# Altium PCB 十二进十二出 .PcbDoc (part 3 of 3)
Units mil, origin at the board's own origin, x right, y up, seen from the top; angles counter-clockwise.
Board outline 4818.9 x 3440.94 mil, 2 copper layers (Top Layer, Bottom Layer); 184 components, 190 nets, 626 pads, 130 vias.
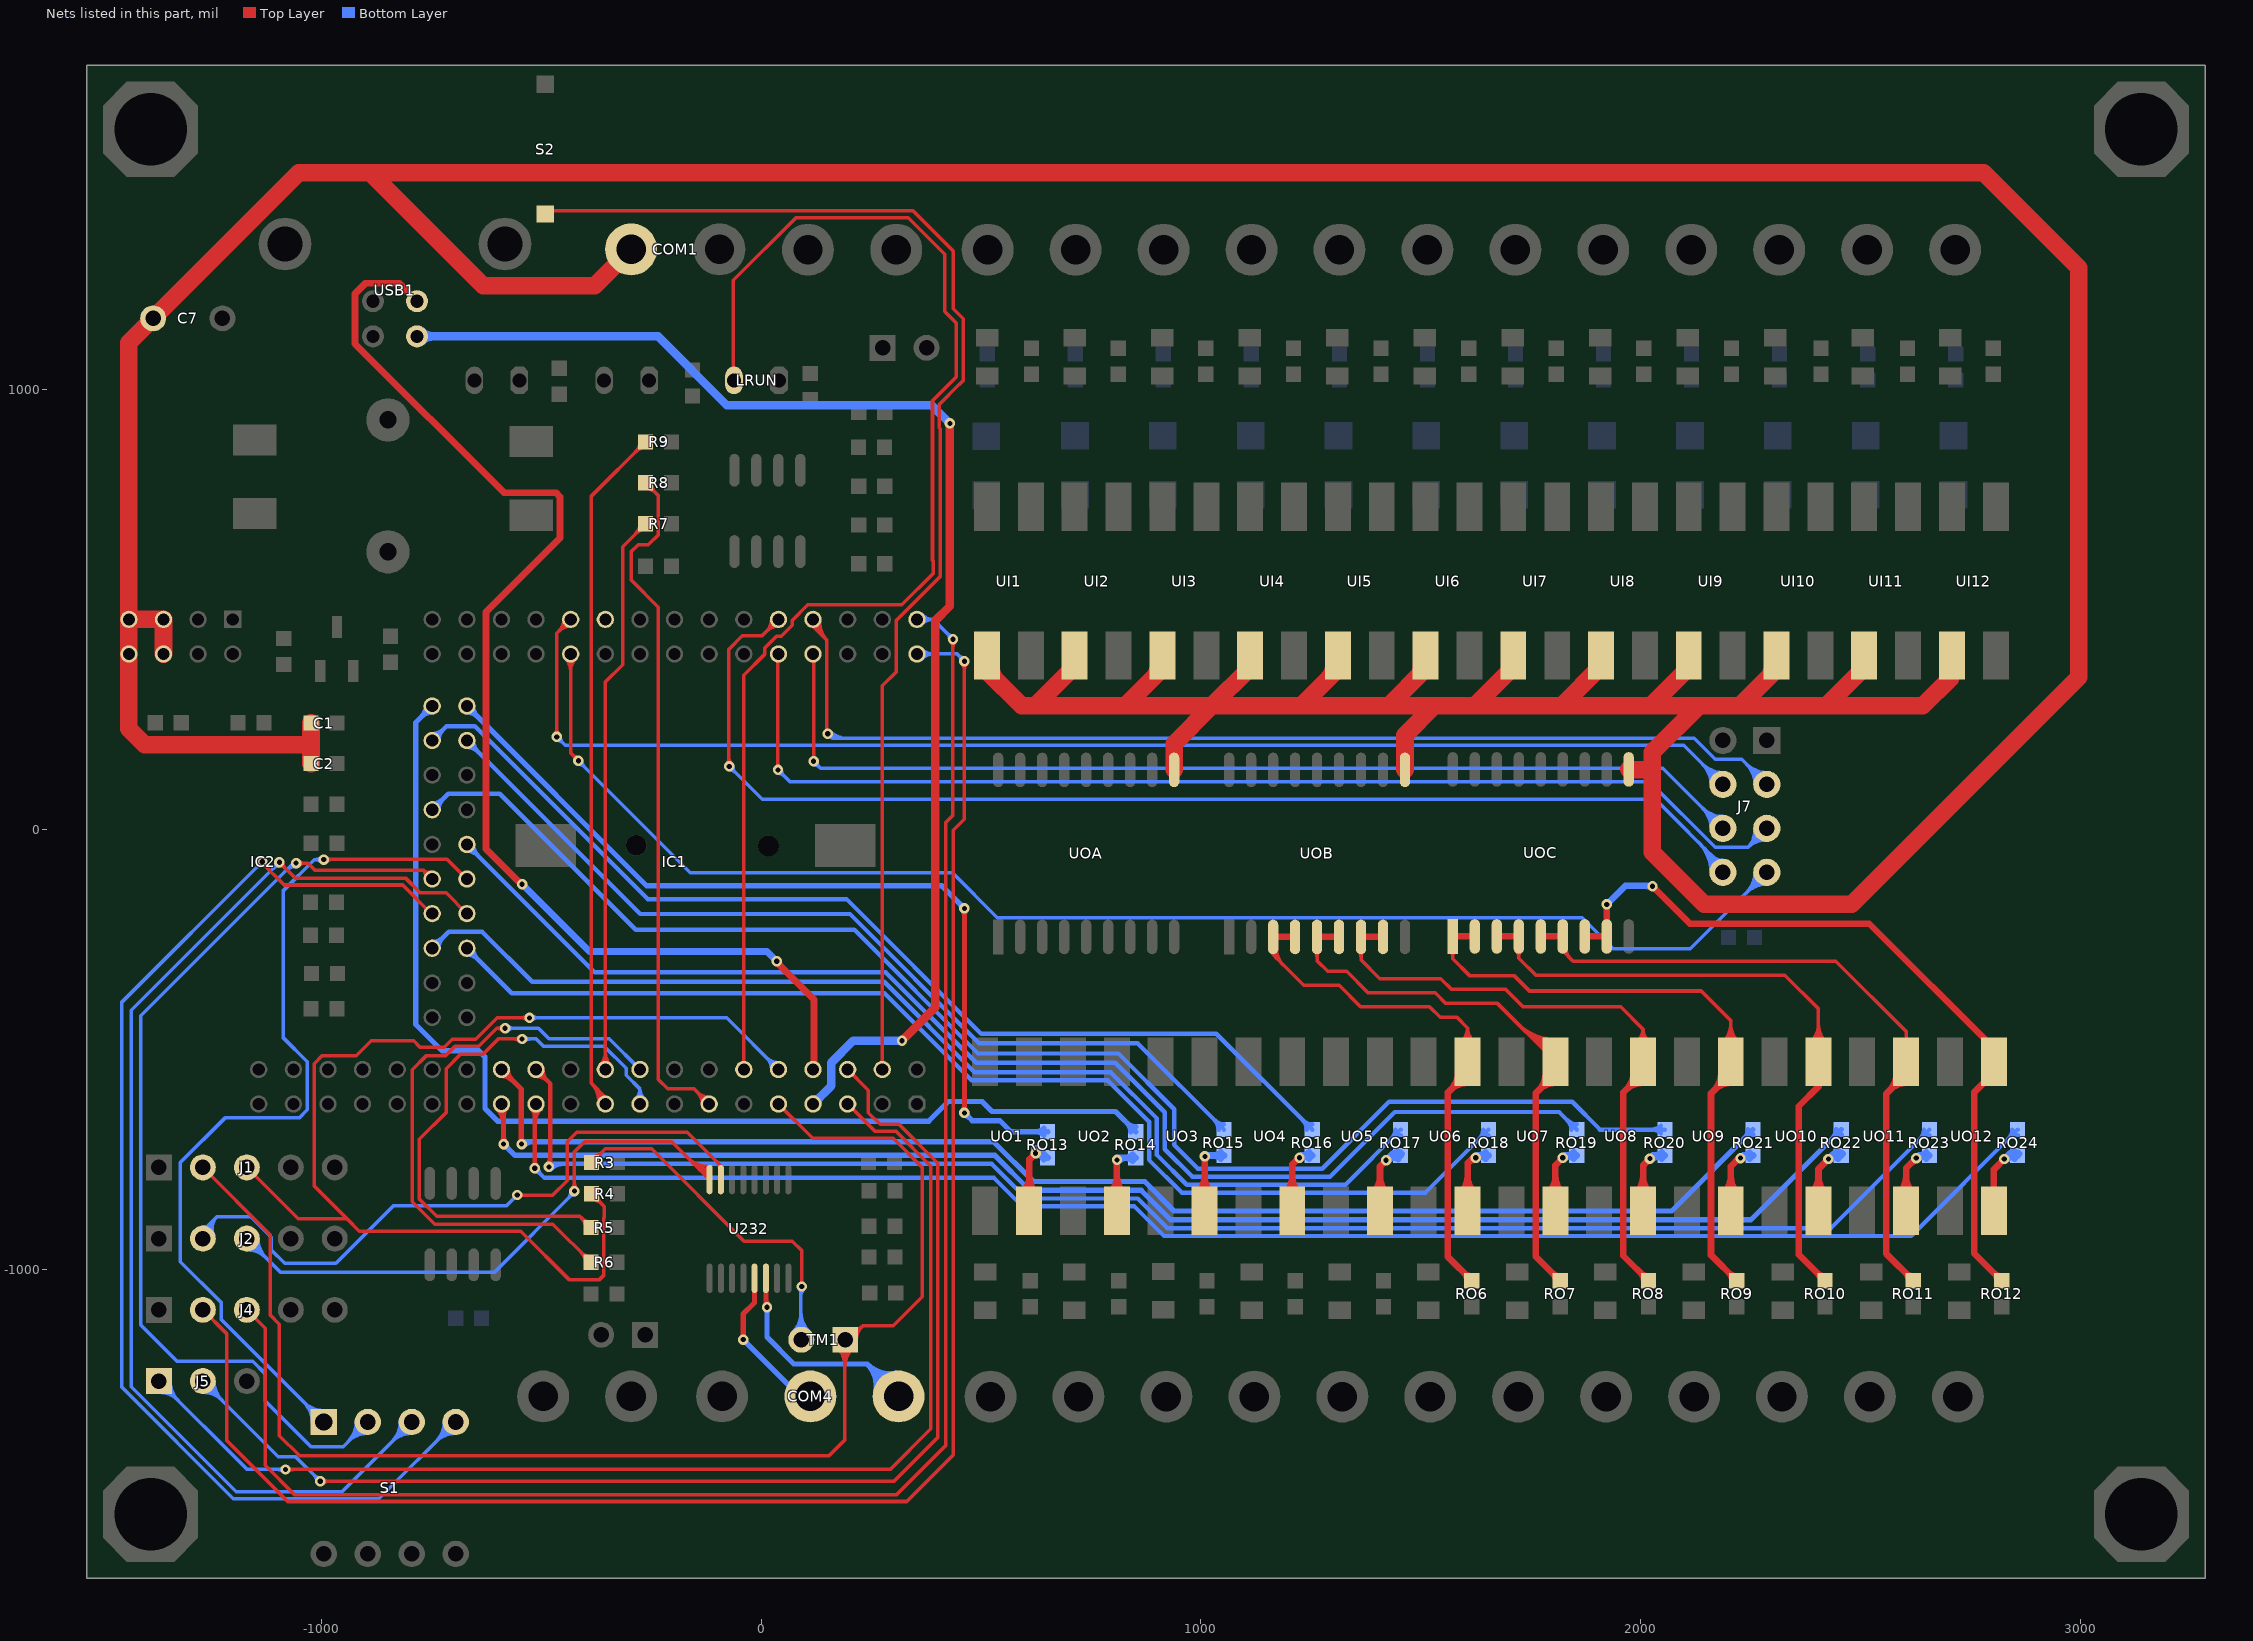
[diagram p3: the nets of this part, all layers, seen from the top]

## Via types
v1: diameter 23.62, hole 11.81, Top Layer to Bottom Layer, 130 vias

## Nets (pads, with @x,y where several pads share a name; then routed paths per layer and width w, separated by ;. In a path a pad name is that pad's centre, name@x,y a point inside that pad or via, vN(x,y) a via of type N, cw(c..) or ccw(c..) an arc to the next point about the centre after c; other vN are vias at no path point) (continued)
NetRO6_1: RO6.1 UO6.3 UOB.3 UOB.4 | length 1532.7
  Top Layer w8: UOB.3@1160.48,-278.59 cw(c1157.23,-284.7) 1164.15,-284.7 ; UOB.3@1163.96,-271.69 ccw(c1194.89,-271.69) 1173.02,-293.57 ; UOB.3@1164.15,-244.13 1164.15,-284.7 ; UOB.3@1167.81,-278.59 ccw(c1171.06,-284.7) 1164.15,-284.7 ; UOB.3@1171.96,-271.69 ccw(c1222.21,-271.69) 1186.67,-307.23 ; UO6.3@1591.28,-482.5 ccw(c1567.83,-451.51) 1606.69,-451.51 ; UO6.3@1596.11,-488.88 ccw(c1580.01,-467.6) 1606.69,-467.6 ccw(c1633.38,-467.6) UO6.3@1617.27,-488.88 ; UO6.3@1606.69,-528.44 1606.69,-451.51 ; UO6.3@1622.1,-482.5 cw(c1645.56,-451.51) 1606.69,-451.51 ; 1164.15,-284.7 1233.66,-354.21 1314.42,-354.21 1363.08,-402.87 1496.01,-402.87 1496.05,-402.84 1519.77,-402.84 1544.04,-427.12 1582.3,-427.12 1606.69,-451.51
  Top Layer w15: UOB.3@1170.01,-244.13 UOB.4@1214.15,-244.13 ; 1566.76,-592.6 cw(c1606.69,-632.53) UO6.3@1606.69,-576.06 ; 1570.05,-589.31 ccw(c1534.78,-554.03) UO6.3@1584.66,-554.03 ; RO6.1@1606.41,-1026.21 ccw(c1582.7,-1026.21) 1599.47,-1009.44 ccw(c1616.24,-992.68) RO6.1@1616.24,-1016.39 ; UO6.3@1606.69,-528.44 1606.69,-552.67 1561.79,-597.57 1561.79,-971.77 RO6.1@1616.24,-1026.21
NetRO7_1: RO7.1 UO7.3 UOB.5 UOB.6 | length 1751.4
  Top Layer w8: UOB.5@1258.62,-277.22 cw(c1245.29,-290.55) 1264.15,-290.55 cw(c1283,-290.55) UOB.5@1269.67,-277.22 ; UOB.5@1264.15,-244.13 1264.15,-298.15 1288.46,-322.46 1331.42,-322.46 1379.96,-371 1532.83,-371 1557.2,-395.37 1674.51,-395.37 1806.15,-527 UO7.3@1806.15,-528.44 ; 1721.34,-442.19 ccw(c1806.15,-357.38) UO7.3@1806.15,-477.32 ; 1734.99,-455.85 ccw(c1806.15,-384.7) UO7.3@1806.15,-485.32 ; 1748.65,-469.51 ccw(c1806.15,-412.01) UO7.3@1806.15,-493.32 ; 1762.31,-483.16 ccw(c1806.15,-439.33) UO7.3@1806.15,-501.32 ; 1775.96,-496.82 ccw(c1806.15,-466.64) UO7.3@1806.15,-509.32
  Top Layer w15: UOB.5@1264.15,-244.13 UOB.6@1314.15,-244.13 ; 1767.71,-593.65 ccw(c1728.09,-554.03) UO7.3@1784.12,-554.03 ; 1770.56,-590.8 cw(c1806.15,-626.39) UO7.3@1806.15,-576.06 ; UO7.3@1806.15,-528.44 1806.15,-555.21 1761.24,-600.11 1761.24,-970.4 RO7.1@1817.05,-1026.21 ; RO7.1@1807.23,-1026.21 ccw(c1783.52,-1026.21) 1800.29,-1009.44 ccw(c1817.05,-992.68) RO7.1@1817.05,-1016.39
NetRO8_1: RO8.1 UO8.3 UOB.7 UOB.8 | length 1685.7
  Top Layer w8: UOB.7@1358.62,-277.22 cw(c1345.29,-290.55) 1364.15,-290.55 cw(c1383,-290.55) UOB.7@1369.67,-277.22 ; UOB.7@1364.15,-244.13 1364.15,-296.15 1407,-339 1545.72,-339 1570.35,-363.62 1693.32,-363.62 1732.52,-402.83 1954.76,-402.83 2005.6,-453.67 ; UO8.3@1990.91,-481.97 ccw(c1970.99,-453.67) 2005.6,-453.67 ; UO8.3@1995.51,-488.52 ccw(c1981.83,-469.08) 2005.6,-469.08 ccw(c2029.37,-469.08) UO8.3@2015.69,-488.52 ; UO8.3@2005.6,-528.44 2005.6,-453.67 ; UO8.3@2020.29,-481.97 cw(c2040.21,-453.67) 2005.6,-453.67
  Top Layer w15: UOB.7@1364.15,-244.13 UOB.8@1414.15,-244.13 ; 1965.82,-592.54 cw(c2005.6,-632.31) UO8.3@2005.6,-576.06 ; 1968.9,-589.46 ccw(c1933.47,-554.03) UO8.3@1983.57,-554.03 ; UO8.3@2005.6,-528.44 2005.6,-552.76 1960.7,-597.66 1960.7,-969.04 RO8.1@2017.87,-1026.21 ; RO8.1@2008.05,-1026.21 ccw(c1984.34,-1026.21) 2001.1,-1009.44 ccw(c2017.87,-992.68) RO8.1@2017.87,-1016.39
NetRO9_1: RO9.1 UO9.3 UOC.1 UOC.2 | length 1739.7
  Top Layer w8: UOC.1@1567.48,-276.08 cw(c1554.14,-289.42) 1573,-289.42 cw(c1591.86,-289.42) UOC.1@1578.52,-276.08 ; UOC.1@1573,-243 1573,-294 1610.87,-331.87 1712.13,-331.87 1747.33,-367.08 2138.01,-367.08 2205.05,-434.12 UO9.3@2205.05,-528.44 ; UO9.3@2187,-484.8 ccw(c2143.43,-441.22) 2205.05,-441.22 ccw(c2266.68,-441.22) UO9.3@2223.11,-484.8 ; UO9.3@2192.66,-490.46 ccw(c2162.74,-460.54) 2205.05,-460.54 ccw(c2247.37,-460.54) UO9.3@2217.45,-490.46
  Top Layer w15: UOC.1@1573,-243 UOC.2@1623,-243 ; 2166.55,-593.81 ccw(c2126.78,-554.03) UO9.3@2183.03,-554.03 ; 2169.62,-590.74 cw(c2205.05,-626.17) UO9.3@2205.05,-576.06 ; UO9.3@2205.05,-528.44 2205.05,-555.3 2160.15,-600.21 2160.15,-967.68 RO9.1@2218.69,-1026.21 ; RO9.1@2208.87,-1026.21 ccw(c2185.15,-1026.21) 2201.92,-1009.44 ccw(c2218.69,-992.68) RO9.1@2218.69,-1016.39
NetRO10_1: RO10.1 UO10.3 UOC.3 UOC.4 | length 1745.3
  Top Layer w8: UOC.4@1717.48,-276.08 cw(c1704.14,-289.42) 1723,-289.42 cw(c1741.86,-289.42) UOC.4@1728.52,-276.08 ; UOC.4@1723,-243 1723,-292.19 1762.14,-331.33 2328.26,-331.33 2404.51,-407.58 UO10.3@2404.51,-528.44 ; UO10.3@2386.46,-484.8 ccw(c2342.88,-441.22) 2404.51,-441.22 ccw(c2466.14,-441.22) UO10.3@2422.56,-484.8 ; UO10.3@2392.12,-490.46 ccw(c2362.19,-460.54) 2404.51,-460.54 ccw(c2446.82,-460.54) UO10.3@2416.9,-490.46
  Top Layer w15: UOC.3@1673,-243 UOC.4@1723,-243 ; UO10.3@2397.73,-574.99 cw(c2394.71,-584.31) 2404.51,-584.31 ; UO10.3@2404.51,-528.44 2404.51,-584.31 ; RO10.1@2409.69,-1026.21 ccw(c2385.97,-1026.21) 2402.74,-1009.44 ccw(c2419.51,-992.68) RO10.1@2419.51,-1016.39 ; UO10.3@2411.29,-574.99 ccw(c2414.31,-584.31) 2404.51,-584.31 ; RO10.1@2419.51,-1026.21 2359.61,-966.31 2359.61,-629.21 2404.51,-584.31
NetRO11_1: RO11.1 UO11.3 UOC.5 UOC.6 | length 1695.8
  Top Layer w8: UOC.6@1823,-243 1823,-275.58 1846.42,-299 2443.93,-299 2603.96,-459.03 UO11.3@2603.96,-528.44 ; UOC.6@1830.81,-270.56 ccw(c1861.8,-270.56) 1839.89,-292.47
  Top Layer w15: UOC.5@1773,-243 UOC.6@1823,-243 ; 2565.4,-593.96 ccw(c2525.47,-554.03) UO11.3@2581.94,-554.03 ; 2568.69,-590.67 cw(c2603.96,-625.95) UO11.3@2603.96,-576.06 ; UO11.3@2603.96,-528.44 2603.96,-555.39 2559.06,-600.3 2559.06,-964.95 RO11.1@2620.33,-1026.21 ; RO11.1@2610.5,-1026.21 ccw(c2586.79,-1026.21) 2603.56,-1009.44 ccw(c2620.33,-992.68) RO11.1@2620.33,-1016.39
NetRO12_1: RO12.1 UO12.3 UOC.7 UOC.8 | length 1795.3
  Top Layer w15: UOC.7@1873,-243 UOC.8@1923,-243 v1(1923,-170) ; v1(2027,-129) 2112.21,-214.21 2520.21,-214.21 2803.42,-497.42 UO12.3@2803.42,-528.44 2803.42,-552.94 2758.52,-597.84 2758.52,-963.58 RO12.1@2821.14,-1026.21 ; RO12.1@2811.32,-1026.21 ccw(c2787.61,-1026.21) 2804.38,-1009.44 ccw(c2821.14,-992.68) RO12.1@2821.14,-1016.39
  Bottom Layer w15: v1(1923,-170) 1965,-128 2026,-128 v1(2027,-129) ; 2014.18,-128 cw(c2014.18,-141.82) v1@2023.95,-132.05
NetRO13_2: RO13.2 UO1.2 | length 320.5
  Top Layer w15: UO1.2@593.84,-825.86 ccw(c554.79,-786.8) 610.02,-786.8 ; UO1.2@609.42,-867.02 610.02,-866.42 610.02,-750.34 v1(624.15,-736.21) ; 610.02,-789.7 ccw(c661.15,-789.7) UO1.2@624.99,-825.86
  Bottom Layer w15: v1@620.67,-726.1 cw(c625.01,-738.72) RO13.2@634.44,-729.29 ; v1@625.55,-740.29 cw(c633.7,-763.99) RO13.2@651.42,-746.27 641.36,-736.21 623.15,-736.21 cw(c623.15,-756.43) RO13.2@642.18,-749.59
NetRO14_2: RO14.2 UO2.2 | length 303
  Top Layer w15: UO2.2@793.3,-825.86 ccw(c755.69,-788.25) 808.87,-788.25 ccw(c862.05,-788.25) UO2.2@824.45,-825.86 ; UO2.2@808.87,-867.02 808.87,-751.49 v1(809.15,-751.21)
  Bottom Layer w15: v1(809.15,-751.21) 814.09,-746.27 RO14.2@851.96,-746.27 ; v1@812.19,-754.26 cw(c831.49,-773.56) 831.49,-746.27 ; RO14.2@845.02,-753.21 ccw(c828.25,-769.98) 828.25,-746.27 ccw(c828.25,-722.55) RO14.2@845.02,-739.32
NetRO15_2: RO15.2 UO3.2 | length 312.9
  Top Layer w15: UO3.2@992.75,-825.86 ccw(c955.15,-788.25) 1008.33,-788.25 ccw(c1061.51,-788.25) UO3.2@1023.9,-825.86 ; UO3.2@1008.33,-867.02 1008.33,-744.03 v1(1009.15,-743.21) ; 1008.33,-755.6 cw(c1021.53,-755.6) v1@1012.19,-746.26
  Bottom Layer w15: v1(1009.15,-743.21) 1011.09,-741.27 RO15.2@1052.51,-741.27 ; v1@1012.19,-746.26 cw(c1024.25,-758.32) 1024.25,-741.27 ; RO15.2@1045.56,-748.21 ccw(c1028.8,-764.98) 1028.8,-741.27 ccw(c1028.8,-717.55) RO15.2@1045.56,-734.32
NetRO16_2: RO16.2 UO4.2 | length 328.8
  Top Layer w15: UO4.2@1192.21,-825.86 ccw(c1154.6,-788.25) 1207.78,-788.25 ccw(c1260.96,-788.25) UO4.2@1223.36,-825.86 ; UO4.2@1207.78,-867.02 1207.78,-761.58 1223.15,-746.21 v1(1224.15,-746.21) ; 1215.08,-754.28 cw(c1224.15,-763.35) v1@1224.15,-750.52
  Bottom Layer w15: v1(1224.15,-746.21) 1229.09,-741.27 RO16.2@1253.06,-741.27 ; v1@1227.19,-749.26 cw(c1246.49,-768.56) RO16.2@1246.49,-741.27 ; v1@1227.88,-748.37 cw(c1247.04,-759.43) RO16.2@1241.31,-738.06 ; RO16.2@1246.11,-748.21 ccw(c1229.34,-764.98) 1229.34,-741.27 ccw(c1229.34,-717.55) RO16.2@1246.11,-734.32
NetRO17_2: RO17.2 UO5.2 | length 392.5
  Top Layer w15: UO5.2@1391.66,-825.86 ccw(c1354.06,-788.25) 1407.24,-788.25 ccw(c1460.42,-788.25) UO5.2@1422.81,-825.86 ; UO5.2@1407.24,-867.02 1407.24,-766.12 v1(1421.15,-752.21)
  Bottom Layer w15: v1@1424.43,-755.01 cw(c1454.14,-780.27) RO17.2@1454.15,-741.27 1432.09,-741.27 ; v1@1424.88,-754.37 cw(c1456.78,-772.78) RO17.2@1447.24,-737.21 ; 1434.11,-739.25 cw(c1446.96,-752.09) RO17.2@1457.01,-736.95 ; RO17.2@1446.84,-747.84 ccw(c1432.09,-761.11) 1432.09,-741.27 ; RO17.2@1446.84,-734.7 cw(c1432.09,-721.42) 1432.09,-741.27 ; RO17.2@1448.71,-749.45 ccw(c1436.62,-767.68) v1(1421.15,-752.21) 1432.09,-741.27
NetRO18_2: RO18.2 UO6.2 | length 344.1
  Top Layer w15: UO6.2@1591.12,-825.86 ccw(c1553.51,-788.25) 1606.69,-788.25 ccw(c1659.87,-788.25) UO6.2@1622.27,-825.86 ; UO6.2@1606.69,-867.02 1606.69,-758.67 1619.15,-746.21 v1(1625.15,-746.21) ; 1607.54,-757.81 cw(c1625.15,-775.42) v1@1625.15,-750.52
  Bottom Layer w15: v1(1625.15,-746.21) 1624.15,-745.21 1628.09,-741.27 RO18.2@1654.15,-741.27 ; v1@1628.19,-749.26 cw(c1647.49,-768.56) RO18.2@1647.49,-741.27 ; v1@1628.88,-748.37 cw(c1647.97,-759.39) RO18.2@1642.26,-738.1 ; RO18.2@1647.2,-748.21 ccw(c1630.43,-764.98) 1630.43,-741.27 ccw(c1630.43,-717.55) RO18.2@1647.2,-734.32
NetRO19_2: RO19.2 UO7.2 | length 319.2
  Top Layer w15: UO7.2@1790.57,-825.86 ccw(c1752.97,-788.25) 1806.15,-788.25 ccw(c1859.32,-788.25) UO7.2@1821.72,-825.86 ; UO7.2@1806.15,-867.02 1806.15,-763.21 v1(1823.15,-746.21)
  Bottom Layer w15: v1(1823.15,-746.21) 1828.09,-741.27 RO19.2@1854.69,-741.27 ; v1@1826.19,-749.26 cw(c1845.49,-768.56) RO19.2@1845.49,-741.27 ; v1@1826.88,-748.37 cw(c1844.02,-758.27) RO19.2@1838.9,-739.14 ; RO19.2@1847.75,-748.21 ccw(c1830.98,-764.98) 1830.98,-741.27 ccw(c1830.98,-717.55) RO19.2@1847.75,-734.32
NetRO20_2: RO20.2 UO8.2 | length 328.8
  Top Layer w15: UO8.2@1990.02,-825.86 ccw(c1952.42,-788.25) 2005.6,-788.25 ccw(c2058.78,-788.25) UO8.2@2021.18,-825.86 ; UO8.2@2005.6,-867.02 2005.6,-763.76 v1(2021.15,-748.21)
  Bottom Layer w15: v1(2021.15,-748.21) 2028.09,-741.27 RO20.2@2055.24,-741.27 ; v1@2024.19,-751.26 cw(c2048.32,-775.39) RO20.2@2048.32,-741.27 ; v1@2024.88,-750.37 cw(c2045.79,-762.44) RO20.2@2039.54,-739.12 ; RO20.2@2048.29,-748.21 ccw(c2031.52,-764.98) 2031.52,-741.27 ccw(c2031.52,-717.55) RO20.2@2048.29,-734.32
NetRO21_2: RO21.2 UO9.2 | length 337.6
  Top Layer w15: UO9.2@2189.48,-825.86 ccw(c2151.88,-788.25) 2205.05,-788.25 ccw(c2258.23,-788.25) UO9.2@2220.63,-825.86 ; UO9.2@2205.05,-867.02 2205.05,-766.3 2224.15,-747.21 v1(2227.15,-747.21) ; 2214.67,-756.69 cw(c2227.15,-769.17) v1@2227.15,-751.52
  Bottom Layer w15: v1(2227.15,-747.21) v1@2233.09,-741.27 ; v1@2230.19,-750.26 cw(c2251.91,-771.97) RO21.2@2251.91,-741.27 ; v1@2230.88,-749.37 cw(c2252.32,-761.75) RO21.2@2245.91,-737.83 ; RO21.2@2248.62,-747.99 ccw(c2233.09,-762.56) v1@2233.09,-741.27 ; RO21.2@2248.62,-734.55 cw(c2233.09,-719.97) v1@2233.09,-741.27 ; RO21.2@2255.78,-741.27 v1@2233.09,-741.27
NetRO22_2: RO22.2 UO10.2 | length 394.5
  Top Layer w15: UO10.2@2388.93,-825.86 ccw(c2351.33,-788.25) 2404.51,-788.25 ccw(c2457.69,-788.25) UO10.2@2420.09,-825.86 ; UO10.2@2404.51,-867.02 2404.51,-771.85 v1(2427.15,-749.21)
  Bottom Layer w15: v1@2430.22,-752.23 cw(c2456.33,-777.82) RO22.2@2456.33,-741.27 v1@2435.09,-741.27 ; v1@2430.88,-751.37 cw(c2456.5,-766.16) RO22.2@2448.84,-737.58 ; v1@2431.31,-750.33 cw(c2454.89,-756.65) RO22.2@2442.69,-735.5 ; 2438.36,-738 cw(c2449.38,-749.03) RO22.2@2459.78,-737.41 ; RO22.2@2448.84,-747.63 ccw(c2435.09,-759.31) v1@2435.09,-741.27 ; RO22.2@2448.84,-734.91 cw(c2435.09,-723.22) v1@2435.09,-741.27 ; RO22.2@2449.78,-748.59 ccw(c2438.79,-760.86) v1(2427.15,-749.21) v1@2435.09,-741.27
NetRO23_2: RO23.2 UO11.2 | length 325.9
  Top Layer w15: UO11.2@2588.39,-825.86 ccw(c2550.78,-788.25) 2603.96,-788.25 ccw(c2657.14,-788.25) UO11.2@2619.54,-825.86 ; UO11.2@2603.96,-867.02 2603.96,-770.39 v1(2627.15,-747.21)
  Bottom Layer w15: v1(2627.15,-747.21) 2633.09,-741.27 RO23.2@2656.87,-741.27 ; v1@2630.19,-750.26 cw(c2651.91,-771.97) RO23.2@2651.91,-741.27 ; v1@2630.88,-749.37 cw(c2652.27,-761.72) RO23.2@2645.88,-737.86 ; RO23.2@2649.93,-748.21 ccw(c2633.16,-764.98) 2633.16,-741.27 ccw(c2633.16,-717.55) RO23.2@2649.93,-734.32
NetRO24_2: RO24.2 UO12.2 | length 318
  Top Layer w15: UO12.2@2803.42,-867.02 2803.42,-772.94 v1(2827.15,-749.21)
  Bottom Layer w15: v1@2830.19,-752.26 cw(c2856.73,-778.8) RO24.2@2856.73,-741.27 ; v1@2830.88,-751.37 cw(c2856.5,-766.16) RO24.2@2848.84,-737.58 ; v1@2831.31,-750.33 cw(c2854.87,-756.64) RO24.2@2842.68,-735.52 ; 2838.34,-738.02 cw(c2849.93,-749.61) RO24.2@2860.88,-737.42 ; RO24.2@2850.18,-747.9 ccw(c2835.09,-761.73) v1@2835.09,-741.27 ; RO24.2@2850.18,-734.63 cw(c2835.09,-720.81) v1@2835.09,-741.27 ; RO24.2@2850.85,-748.58 ccw(c2839.34,-761.4) v1(2827.15,-749.21) v1@2835.09,-741.27 ; RO24.2@2857.42,-741.27 v1@2835.09,-741.27
NRST: IC1.4 S2.1 | length 2918.4
  Top Layer w8: S2.1@-490.85,1400.15 -483.22,1407.79 345.15,1407.79 437.15,1315.79 437.15,1184.79 459.7,1162.23 459.7,1021.35 449.83,1011.47 449.34,1011.47 405.46,967.6 405.46,913.98 407.43,912.01 407.43,575.62 341.52,509.71 341.07,509.71 306.96,475.6 306.96,358.35 275.41,326.79 IC1.4@275.41,-545.47
OUT1: IC1.49 RO13.1 | length 2177.4
  Top Layer w12: v1@458.04,-640.1 ccw(c448.12,-630.18) 462.15,-630.18 ccw(c476.17,-630.18) v1@466.25,-640.1 ; v1@458.04,-183.32 cw(c448.12,-193.24) 462.15,-193.24 cw(c476.17,-193.24) v1@466.25,-183.32 ; v1(462.15,-644.21) v1(462.15,-179.21)
  Bottom Layer w12: IC1.49@-669.48,267.61 cw(c-669.48,234.58) -646.11,257.94 cw(c-622.75,281.3) IC1.49@-655.79,281.3 ; IC1.49@-669.48,281.3 -260.18,-128 410.93,-128 v1(462.15,-179.21) ; v1@456.33,-179.21 ccw(c442.31,-179.21) 452.23,-169.29 ccw(c462.15,-159.37) v1@462.15,-173.4 ; v1@462.15,-650.02 cw(c462.15,-664.05) 472.07,-654.13 cw(c481.99,-644.21) v1@467.96,-644.21 ; v1(462.15,-644.21) 480.15,-662.21 543.15,-662.21 568.15,-687.21 RO13.1@651.42,-687.21 ; RO13.1@643.41,-695.22 ccw(c624.08,-714.55) 624.08,-687.21 ccw(c624.08,-659.88) RO13.1@643.41,-679.21
OUT2: IC1.50 RO14.1 | length 2679.1
  Bottom Layer w12: IC1.50@-761.9,281.3 cw(c-794.94,281.3) -771.58,257.94 cw(c-748.22,234.58) IC1.50@-748.22,267.61 ; IC1.50@-748.22,281.3 -785.78,243.74 -785.78,-442.92 -725.48,-503.21 -641.85,-503.21 -628.3,-516.77 -628.3,-634.11 -599.41,-663 381,-663 425.47,-618.53 502.53,-618.53 525.21,-641.21 805.96,-641.21 RO14.1@851.96,-687.21 ; RO14.1@840.64,-687.21 ccw(c813.31,-687.21) 832.63,-667.88 ccw(c851.96,-648.55) RO14.1@851.96,-675.89
OUT3: IC1.47 RO15.1 | length 2190.9
  Bottom Layer w10: IC1.47@-669.48,187.87 cw(c-669.48,152.42) -644.41,177.49 cw(c-619.34,202.56) IC1.47@-654.79,202.56 ; IC1.47@-669.48,202.56 -274.92,-192 201.93,-192 496.15,-486.21 856.51,-486.21 RO15.1@1052.51,-682.21 ; RO15.1@1040.19,-682.21 ccw(c1010.44,-682.21) 1031.47,-661.18 ccw(c1052.51,-640.14) RO15.1@1052.51,-669.89
OUT4: IC1.48 RO16.1 | length 2497.1
  Bottom Layer w10: IC1.48@-748.22,202.56 -715.66,235.12 -651.18,235.12 -258.07,-158 193.93,-158 500.15,-464.21 1035.06,-464.21 RO16.1@1253.06,-682.21 ; IC1.48@-748.22,217.24 ccw(c-748.22,252.7) -723.15,227.63 ccw(c-698.08,202.56) IC1.48@-733.53,202.56 ; RO16.1@1240.73,-682.21 ccw(c1210.98,-682.21) 1232.02,-661.18 ccw(c1253.06,-640.14) RO16.1@1253.06,-669.89
OUT5: IC1.36 RO17.1 | length 2659.1
  Bottom Layer w10: IC1.36@-748.22,-269.88 -710.66,-232.32 -634.74,-232.32 -520.85,-346.21 279.59,-346.21 485.64,-552.26 795.15,-552.26 900.04,-657.15 900.04,-740.04 967.59,-807.59 1328.77,-807.59 RO17.1@1454.15,-682.21 ; IC1.36@-748.22,-255.2 ccw(c-748.22,-219.74) -723.15,-244.81 ccw(c-698.08,-269.88) IC1.36@-733.53,-269.88 ; RO17.1@1441.82,-682.21 cw(c1412.07,-682.21) 1433.11,-703.25 cw(c1454.15,-724.29) RO17.1@1454.15,-694.54
OUT6: IC1.35 RO18.1 | length 2766.2
  Bottom Layer w10: IC1.35@-669.48,-284.57 cw(c-669.48,-320.02) -644.41,-294.95 cw(c-619.34,-269.88) IC1.35@-654.79,-269.88 ; IC1.35@-669.48,-269.88 -567.15,-372.21 280.31,-372.21 478.31,-570.21 787.82,-570.21 882.16,-664.56 882.16,-751.16 956.46,-825.46 1510.89,-825.46 RO18.1@1654.15,-682.21 ; RO18.1@1641.82,-682.21 cw(c1612.07,-682.21) 1633.11,-703.25 cw(c1654.15,-724.29) RO18.1@1654.15,-694.54
OUT7: IC1.41 RO19.1 | length 3066.6
  Bottom Layer w10: IC1.41@-669.48,-48.35 cw(c-669.48,-83.8) -644.41,-58.73 cw(c-619.34,-33.66) IC1.41@-654.79,-33.66 ; IC1.41@-669.48,-33.66 -378.93,-324.21 282.87,-324.21 488.87,-530.21 805.15,-530.21 917.91,-642.98 917.91,-726.91 980.72,-789.72 1293.64,-789.72 1441.15,-642.21 1814.69,-642.21 RO19.1@1854.69,-682.21 ; RO19.1@1842.37,-682.21 ccw(c1812.62,-682.21) 1833.65,-661.18 ccw(c1854.69,-640.14) RO19.1@1854.69,-669.89
OUT8: IC1.44 RO20.1 | length 3411.2
  Bottom Layer w10: IC1.44@-748.22,45.08 -711.51,81.79 -594.85,81.79 -285.07,-228 211.93,-228 493.15,-509.21 812.42,-509.21 939.15,-635.93 939.15,-717.15 993.21,-771.21 1029.6,-771.21 1029.85,-771.46 1275.71,-771.46 1427.96,-619.21 1844.54,-619.21 1907.54,-682.21 RO20.1@2055.24,-682.21 ; IC1.44@-748.22,59.76 ccw(c-748.22,95.22) -723.15,70.15 ccw(c-698.08,45.08) IC1.44@-733.53,45.08 ; RO20.1@2046.52,-690.93 ccw(c2025.49,-711.96) 2025.49,-682.21 ccw(c2025.49,-652.46) RO20.1@2046.52,-673.5
OUT9: IC1.26 RO21.1 | length 3274.4
  Top Layer w12: IC1.26@-590.74,-559.16 cw(c-590.74,-592.2) -567.37,-568.83 cw(c-544.01,-545.47) IC1.26@-577.05,-545.47 ; IC1.26@-590.74,-545.47 -545.55,-590.65 -545.55,-714.51 v1(-544.85,-715.21) ; v1@-548.96,-711.1 ccw(c-557.19,-702.88) -545.55,-702.88 ; -545.55,-699.49 ccw(c-529.13,-699.49) v1@-540.75,-711.1
  Bottom Layer w12: v1(-544.85,-715.21) -539.85,-710.21 528.75,-710.21 618.87,-800.34 872.3,-800.34 939.17,-867.21 2070.78,-867.21 RO21.1@2255.78,-682.21 ; v1@-540.75,-719.32 cw(c-518.75,-741.31) -518.75,-710.21 ; RO21.1@2244.46,-682.21 cw(c2217.12,-682.21) 2236.45,-701.54 cw(c2255.78,-720.87) RO21.1@2255.78,-693.54
OUT10: IC1.25 RO22.1 | length 3430.3
  Top Layer w12: IC1.25@-600.41,-633.89 cw(c-635.56,-669.04) -585.85,-669.04 ; IC1.25@-590.74,-624.21 -585.85,-629.09 v1(-585.85,-715.21) ; v1@-589.96,-711.1 ccw(c-599.88,-701.18) -585.85,-701.18 ccw(c-571.83,-701.18) v1@-581.75,-711.1 ; -585.85,-645.47 cw(c-569.48,-645.47) IC1.25@-581.06,-633.89
  Bottom Layer w12: v1@-585.85,-721.02 cw(c-585.85,-735.05) -575.93,-725.13 cw(c-566.01,-715.21) v1@-580.04,-715.21 ; v1(-585.85,-715.21) -560.17,-740.9 531.33,-740.9 610.64,-820.21 864.07,-820.21 931.07,-887.21 2251.33,-887.21 RO22.1@2456.33,-682.21 ; RO22.1@2445,-682.21 cw(c2417.67,-682.21) 2437,-701.54 cw(c2456.33,-720.87) RO22.1@2456.33,-693.54
OUT11: IC1.24 RO23.1 | length 3688.7
  Top Layer w10: IC1.24@-512,-560.16 cw(c-512,-595.61) -486.93,-570.54 cw(c-461.86,-545.47) IC1.24@-497.31,-545.47 ; IC1.24@-512,-545.47 -479.44,-578.03 -479.44,-763.8 v1(-482.85,-767.21) ; v1@-487.67,-762.4 ccw(c-507.55,-742.52) -479.44,-742.52
  Bottom Layer w10: v1(-482.85,-767.21) -475.85,-760.21 523.95,-760.21 602.82,-839.09 856.25,-839.09 923.37,-906.21 2432.87,-906.21 RO23.1@2656.87,-682.21 ; v1@-478.04,-772.03 cw(c-449.51,-800.56) -449.51,-760.21 ; RO23.1@2644.55,-682.21 cw(c2614.8,-682.21) 2635.84,-703.25 cw(c2656.87,-724.29) RO23.1@2656.87,-694.54
OUT12: IC1.23 RO24.1 | length 3837.6
  Top Layer w10: IC1.23@-522.38,-634.6 cw(c-540.55,-652.76) -514.85,-652.76 ; v1@-519.67,-765.4 ccw(c-531.3,-753.77) -514.85,-753.77 ccw(c-498.41,-753.77) v1@-510.04,-765.4 ; v1(-514.85,-770.21) -514.85,-627.07 IC1.23@-512,-624.21 ; -514.85,-666.57 cw(c-469.64,-666.57) IC1.23@-501.61,-634.6
  Bottom Layer w10: v1@-514.85,-777.02 cw(c-514.85,-793.47) -503.23,-781.84 cw(c-491.6,-770.21) v1@-508.04,-770.21 ; v1(-514.85,-770.21) -492.85,-792.21 529.4,-792.21 594.15,-856.96 848.84,-856.96 916.1,-924.21 2615.42,-924.21 RO24.1@2857.42,-682.21 ; RO24.1@2845.1,-682.21 cw(c2815.35,-682.21) 2836.38,-703.25 cw(c2857.42,-724.29) RO24.1@2857.42,-694.54
PD10: IC1.13 R8.1 | length 1682.9
  Top Layer w8: R8.1@-262.91,775.46 cw(c-262.91,743.3) -240.17,766.04 cw(c-217.42,788.79) R8.1@-249.59,788.79 ; R8.1@-262.91,788.79 -233.71,759.59 -233.71,670.93 -256.85,647.79 -279.85,647.79 -296,631.64 -296,567.93 -233.85,505.79 -233.85,-568.21 -212.41,-589.65 -152.85,-589.65 IC1.13@-118.3,-624.21 ; IC1.13@-133.98,-624.21 ccw(c-171.85,-624.21) -145.07,-597.44 ccw(c-118.3,-570.66) IC1.13@-118.3,-608.53
PD11: IC1.62
RS232_R: COM4.3 U232.14 | length 779
  Top Layer w12: U232.14@10.53,-1020.42 10.83,-1020.72 10.83,-1083.9 v1(13.15,-1086.21) ; 10.83,-1066.59 ccw(c32.76,-1066.59) v1@17.25,-1082.1
  Bottom Layer w12: v1@9.04,-1090.32 cw(c-0.88,-1100.24) 13.15,-1100.24 cw(c27.17,-1100.24) v1@17.25,-1090.32 ; v1(13.15,-1086.21) 13.15,-1154.21 74.15,-1215.21 240.93,-1215.21 ; 256.93,-1231.2 cw(c217.46,-1270.67) COM4.3@272.26,-1281.23 ; 257.87,-1232.15 ccw(c298.46,-1191.55) COM4.3@306.69,-1248.37 ; COM4.3@260.48,-1278.96 ccw(c190.65,-1265.5) 240.94,-1215.22 ; COM4.3@304.97,-1236.49 cw(c294.18,-1161.97) 240.94,-1215.22 ; COM4.3@314.93,-1289.21 240.93,-1215.21
RS232_T: COM4.2 U232.13 | length 359
  Top Layer w12: v1(-41,-1160) -41,-1115 -41,-1101.94 -15.06,-1076 U232.13@-15.06,-1020.42
  Bottom Layer w12: v1(-41,-1160) 88.21,-1289.21 COM4.2@114.15,-1289.21
RUN_LED: IC1.12 LRUN.K | length 2998.5
  Top Layer w8: LRUN.K@-63.48,1023.34 -63.48,1249.26 79.05,1391.79 334.45,1391.79 417.55,1308.69 417.55,1178.39 443.83,1152.1 443.83,1029.47 389.59,975.23 389.59,613.06 391.36,611.28 391.36,582.45 319.92,511 106.15,511 70.74,475.6 70.74,465.08 45.45,439.79 34.93,439.79 7.63,412.48 7.63,398.27 -39.56,351.09 IC1.12@-39.56,-545.47
RX1: IC1.10 J1.3 R4.1 | length 2833.8
  Top Layer w8: J1.3@-1169.85,-768.21 -1052.63,-885.44 -942.08,-885.44 ; -546.3,-427.97 cw(c-546.3,-447.65) v1@-532.38,-433.74 ; -545.13,-427.97 ccw(c-545.13,-409.94) v1@-532.38,-422.69 ; v1(-526.85,-428.21) -527.1,-427.97 -600.18,-427.97 -649,-476.8 -702.89,-476.8 -720.76,-494.67 -776.1,-494.67 -790.55,-480.21 -886.54,-480.21 -920.85,-514.53 -921.47,-513.91 -998.41,-513.91 -1016.89,-532.4 -1016.89,-810.62 -942.08,-885.44 ; R4.1@-385.85,-841.54 cw(c-385.85,-873.7) -363.11,-850.96 cw(c-340.37,-828.21) R4.1@-372.53,-828.21 ; R4.1@-385.85,-828.21 -356.85,-857.21 -356.85,-882.17 -357.66,-882.97 -357.66,-1013.02 -368.85,-1024.21 -435.85,-1024.21 -546.85,-913.21 -914.3,-913.21 -942.08,-885.44
  Bottom Layer w8: v1(-526.85,-428.21) -78.07,-428.21 IC1.10@39.19,-545.47 ; v1@-521.33,-433.74 cw(c-508,-447.07) -508,-428.21 cw(c-508,-409.36) v1@-521.33,-422.69 ; IC1.10@23.5,-545.47 ccw(c-14.37,-545.47) 12.41,-518.7 ccw(c39.19,-491.92) IC1.10@39.19,-529.79
RX2: IC1.18 R6.1 | length 1469.9
  Top Layer w8: v1@-587.93,-457.18 ccw(c-601.27,-470.51) -601.27,-451.66 ccw(c-601.27,-432.8) v1@-587.93,-446.13 ; v1(-582.41,-451.66) -601.41,-451.66 -642.43,-492.67 -696.31,-492.67 -717.55,-513.91 -761.29,-513.91 -793.85,-546.48 -793.85,-846.23 -742.74,-897.34 -473.73,-897.34 R6.1@-386.85,-984.21 ; R6.1@-400.18,-984.21 ccw(c-432.34,-984.21) -409.6,-961.47 ccw(c-386.85,-938.73) R6.1@-386.85,-970.89
  Bottom Layer w8: v1(-582.41,-451.66) -582.17,-451.9 -506.54,-451.9 -482.54,-475.9 -345.35,-475.9 IC1.18@-275.78,-545.47 ; v1@-576.89,-457.18 cw(c-564.14,-469.93) -564.14,-451.9 ; v1@-576.89,-446.13 ccw(c-562.97,-432.21) -562.97,-451.9
RX3: IC1.20 R7.1 | length 1389.2
  Top Layer w8: IC1.20@-365.61,-534.38 ccw(c-392.38,-507.61) -354.52,-507.61 ccw(c-316.65,-507.61) IC1.20@-343.42,-534.38 ; IC1.20@-354.52,-545.47 -354.52,335.79 -315,375.3 -315,643.7 R7.1@-262.91,695.79 ; R7.1@-276.23,695.79 cw(c-308.4,695.79) -285.65,673.04 cw(c-262.91,650.3) R7.1@-262.91,682.46
RX4: IC1.80 J4.3 | length 4059.8
  Top Layer w8: J4.3@-1169.85,-1092.21 -1128,-1134.07 -1128,-1446.07 -1061.85,-1512.21 308.15,-1512.21 420.15,-1400.21 420.15,16.79 436.15,32.79 v1(436.15,432.79) ; IC1.80@354.15,478.15 IC1.80@360.15,472.15 ; v1@430.62,427.26 cw(c417.29,413.93) 436.15,413.93 cw(c455,413.93) v1@441.67,427.26
  Bottom Layer w8: IC1.80@354.15,478.15 390.78,478.15 ; IC1.80@365.5,467.32 cw(c390.78,443.21) 390.78,478.15 ; IC1.80@365.5,488.98 ccw(c390.78,513.09) 390.78,478.15 ; v1@428.33,432.79 ccw(c409.48,432.79) 422.81,446.12 ccw(c436.15,459.46) v1@436.15,440.6 ; v1@436.15,430.79 v1(436.15,432.79) 390.78,478.15
SPI3_CE: IC1.60 J7.3 | length 3270.3
  Top Layer w8: v1@-470.38,216.31 ccw(c-483.81,229.74) -464.81,229.74 ; v1@-464.81,210.83 -464.81,446.59 IC1.60@-433.26,478.15 ; -464.81,229.55 ccw(c-446.09,229.55) v1@-459.33,216.31 ; IC1.60@-448.94,478.15 cw(c-486.81,478.15) -460.03,451.37 cw(c-433.26,424.6) IC1.60@-433.26,462.46
  Bottom Layer w8: v1@-464.85,202.98 cw(c-464.85,184.12) -451.52,197.45 cw(c-438.19,210.79) v1@-457.04,210.79 ; v1(-464.85,210.79) -445.85,191.79 2098.15,191.79 J7.3@2187.15,102.79 ; J7.3@2160.15,102.79 ccw(c2094.96,102.79) 2141.05,148.88 ccw(c2187.15,194.97) J7.3@2187.15,129.79 ; J7.3@2168.15,102.79 ccw(c2122.28,102.79) 2154.71,135.22 ccw(c2187.15,167.66) J7.3@2187.15,121.79
SPI3_CLK: IC1.73 J7.5 | length 2579.7
  Top Layer w8: IC1.73@117.93,399.41 119.15,398.19 v1(119.15,155.58)
  Bottom Layer w8: v1@119.15,147.77 cw(c119.15,128.91) 132.48,142.25 cw(c145.81,155.58) v1@126.96,155.58 ; v1(119.15,155.58) 134.89,139.83 2050.1,139.83 J7.5@2187.15,2.79 ; J7.5@2160.15,2.79 ccw(c2094.96,2.79) 2141.05,48.88 ccw(c2187.15,94.97) J7.5@2187.15,29.79 ; J7.5@2168.15,2.79 ccw(c2122.28,2.79) 2154.71,35.22 ccw(c2187.15,67.66) J7.5@2187.15,21.79
SPI3_CS: IC1.74 J7.4 | length 2814.6
  Top Layer w8: IC1.74@117.61,478.18 ccw(c146.39,475.01) 125.92,454.53 ; IC1.74@117.93,478.15 117.93,462.53 149.48,430.97 ; IC1.74@125.56,477.31 ccw(c167.62,472.67) 137.7,442.75 ; IC1.74@133.52,476.43 ccw(c188.84,470.33) 149.48,430.97 ; v1(151.15,217.79) 149.48,219.45 149.48,430.97
  Bottom Layer w8: v1@151.01,217.65 ccw(c175.14,241.78) 175.14,207.66 ; v1(151.15,217.79) 161.27,207.66 2121.64,207.66 2169.39,159.91 2230.02,159.91 J7.4@2287.15,102.79 ; v1@156.67,223.31 ccw(c194.45,261.09) 194.45,207.66 ; J7.4@2260.15,102.79 ccw(c2194.96,102.79) 2241.05,148.88 ccw(c2287.15,194.97) J7.4@2287.15,129.79 ; J7.4@2268.15,102.79 ccw(c2222.28,102.79) 2254.71,135.22 ccw(c2287.15,167.66) J7.4@2287.15,121.79
SPI3_IRQ: IC1.59 J7.8 | length 3495.3
  Top Layer w8: IC1.59@-444.35,388.32 cw(c-471.12,361.54) -433.26,361.54 cw(c-395.39,361.54) IC1.59@-422.16,388.32 ; IC1.59@-433.26,399.41 -433.26,174.19 v1(-415.85,156.79) ; v1@-423.67,156.79 ccw(c-442.52,156.79) -429.19,170.12 ccw(c-415.85,183.46) v1@-415.85,164.6
  Bottom Layer w8: v1@-415.85,148.98 cw(c-415.85,130.12) -402.52,143.45 cw(c-389.19,156.79) v1@-408.04,156.79 ; v1(-415.85,156.79) -161.07,-98 434.93,-98 537.22,-200.29 1867.22,-200.29 1938.01,-271.09 2113.27,-271.09 J7.8@2287.15,-97.21 ; J7.8@2260.15,-97.21 cw(c2194.96,-97.21) 2241.05,-143.3 cw(c2287.15,-189.4) J7.8@2287.15,-124.21 ; J7.8@2268.15,-97.21 cw(c2222.28,-97.21) 2254.71,-129.65 cw(c2287.15,-162.08) J7.8@2287.15,-116.21
SPI3_MISO: IC1.72 J7.7 | length 3101.8
  Top Layer w8: v1@-78.38,149.31 ccw(c-89.3,160.23) -73.85,160.23 ; -73.85,165.06 ccw(c-51.58,165.06) v1@-67.33,149.31 ; v1(-72.85,143.79) -73.85,144.79 -73.85,409.74 -42.81,440.79 1.82,440.79 IC1.72@39.19,478.15 ; IC1.72@23.5,478.15 cw(c-14.37,478.15) 12.41,451.37 cw(c39.19,424.6) IC1.72@39.19,462.46
  Bottom Layer w8: v1@-72.85,135.98 cw(c-72.85,117.12) -59.52,130.45 cw(c-46.19,143.79) v1@-65.04,143.79 ; v1(-72.85,143.79) 2.09,68.84 2033.94,68.84 2187.15,-84.37 J7.7@2187.15,-97.21 ; 2131.97,-29.19 cw(c2063.95,-97.21) J7.7@2160.15,-97.21 ; 2145.63,-42.85 cw(c2091.27,-97.21) J7.7@2168.15,-97.21 ; 2159.29,-56.5 cw(c2118.58,-97.21) J7.7@2176.15,-97.21 ; 2162.98,-60.2 ccw(c2187.15,-36.04) J7.7@2187.15,-70.21
SPI3_MOSI: IC1.71 J7.6 | length 2789
  Top Layer w8: v1(38.15,135.9) 38.15,398.37 IC1.71@39.19,399.41
  Bottom Layer w8: v1@38.15,128.09 cw(c38.15,109.23) 51.48,122.56 cw(c64.81,135.9) v1@45.96,135.9 ; v1(38.15,135.9) 65.7,108.34 2020.96,108.34 2169.39,-40.09 2244.27,-40.09 ; J7.6@2260.18,1.37 cw(c2205.68,-1.49) 2244.27,-40.08 ; J7.6@2268.17,1.79 cw(c2229.82,-0.22) 2256.98,-27.38 cw(c2284.13,-54.54) J7.6@2286.15,-16.19 ; J7.6@2285.73,-24.17 ccw(c2282.86,-78.67) 2244.27,-40.08 ; J7.6@2287.15,2.79 2244.27,-40.09
SW1: IC1.39 S1.1 | length 2275.7
  Top Layer w8: v1(-994.85,-68.21) -993.85,-67.21 -714.67,-67.21 IC1.39@-669.48,-112.4 ; v1@-989.33,-73.74 cw(c-973.58,-89.48) -973.58,-67.21 ; v1@-989.33,-62.69 ccw(c-978.41,-51.77) -978.41,-67.21
  Bottom Layer w8: S1.1@-1020.85,-1347.21 ccw(c-1083.62,-1347.21) -1039.24,-1302.83 ccw(c-994.85,-1258.44) S1.1@-994.85,-1321.21 ; S1.1@-1012.85,-1347.21 ccw(c-1056.31,-1347.21) -1025.58,-1316.48 ccw(c-994.85,-1285.76) S1.1@-994.85,-1329.21 ; v1@-1000.38,-73.74 ccw(c-1013.71,-87.07) -1013.71,-68.21 ccw(c-1013.71,-49.36) v1@-1000.38,-62.69 ; S1.1@-994.85,-1347.21 -1228.45,-1113.61 -1228.45,-1075.06 -1320.85,-982.66 -1320.85,-757.21 -1219.41,-655.77 -1051,-655.77 -1032.52,-637.28 -1032.52,-528.05 -1086.54,-474.02 -1086.54,-138.39 -1016.36,-68.21 v1(-994.85,-68.21)
SW2: IC1.40 S1.2 | length 2475.6
  Top Layer w8: v1(-1057.85,-76.21) -1030.79,-76.21 -1014.79,-92.21 -768.41,-92.21 ; v1@-1052.33,-81.74 cw(c-1039,-95.07) -1039,-76.21 cw(c-1039,-57.36) v1@-1052.33,-70.69 ; IC1.40@-763.53,-108.99 ccw(c-781.23,-105.04) -768.4,-92.21 ; IC1.40@-751.63,-97.09 cw(c-755.58,-79.39) -768.4,-92.21 ; IC1.40@-748.22,-112.4 -768.41,-92.21
  Bottom Layer w8: -1082.29,-94.15 cw(c-1057.85,-118.58) v1@-1057.85,-84.02 ; v1(-1057.85,-76.21) -1064.36,-76.21 -1411.26,-423.11 -1411.26,-1126.66 -1328.7,-1209.21 -1156.3,-1209.21 -1128.45,-1237.06 -1128.45,-1298.61 -1023.85,-1403.21 -950.85,-1403.21 S1.2@-894.85,-1347.21 ; S1.2@-920.85,-1347.21 cw(c-983.62,-1347.21) -939.24,-1391.6 cw(c-894.85,-1435.98) S1.2@-894.85,-1373.21 ; S1.2@-912.85,-1347.21 cw(c-956.31,-1347.21) -925.58,-1377.94 cw(c-894.85,-1408.67) S1.2@-894.85,-1365.21
SW3: IC1.37 S1.3 | length 2836
  Top Layer w8: v1@-1095.85,-82.02 cw(c-1095.85,-100.88) -1082.52,-87.55 cw(c-1069.19,-74.21) v1@-1088.04,-74.21 ; v1(-1095.85,-74.21) -1059.94,-110.13 -808.94,-110.13 -775.11,-143.96 -716.66,-143.96 IC1.37@-669.48,-191.14
  Bottom Layer w8: v1@-1103.67,-74.21 cw(c-1122.52,-74.21) -1109.19,-87.55 cw(c-1095.85,-100.88) v1@-1095.85,-82.02 ; v1(-1095.85,-74.21) -1432.85,-411.21 -1432.85,-1267.06 -1194.02,-1505.9 -953.54,-1505.9 S1.3@-794.85,-1347.21 ; S1.3@-820.85,-1347.21 cw(c-883.62,-1347.21) -839.24,-1391.6 cw(c-794.85,-1435.98) S1.3@-794.85,-1373.21 ; S1.3@-812.85,-1347.21 cw(c-856.31,-1347.21) -825.58,-1377.94 cw(c-794.85,-1408.67) S1.3@-794.85,-1365.21
SW4: IC1.38 S1.4 | length 2927.8
  Top Layer w8: v1@-1134.85,-81.02 cw(c-1134.85,-92.64) -1126.64,-84.43 ; v1(-1134.85,-73.21) -1134.85,-76.21 -1085.07,-126 -815.52,-126 -750.37,-191.14 IC1.38@-748.22,-191.14 ; v1@-1127.04,-73.21 ccw(c-1100.94,-73.21) -1119.4,-91.67
  Bottom Layer w8: v1@-1142.67,-73.21 cw(c-1161.52,-73.21) -1148.19,-86.55 cw(c-1134.85,-99.88) v1@-1134.85,-81.02 ; v1(-1134.85,-73.21) -1454.85,-393.21 -1454.85,-1267.51 -1200.59,-1521.77 -869.41,-1521.77 S1.4@-694.85,-1347.21 ; S1.4@-720.85,-1347.21 cw(c-783.62,-1347.21) -739.24,-1391.6 cw(c-694.85,-1435.98) S1.4@-694.85,-1373.21 ; S1.4@-712.85,-1347.21 cw(c-756.31,-1347.21) -725.58,-1377.94 cw(c-694.85,-1408.67) S1.4@-694.85,-1365.21
SWDCK: IC1.6 J5.2 | length 2976.8
  Top Layer w8: v1(-1002.85,-1482.21) 302.15,-1482.21 401.74,-1382.62 401.74,-758.9 313.3,-670.46 270.74,-670.46 243.85,-643.57 243.85,-592.65 IC1.6@196.67,-545.47 ; v1@-997.33,-1487.74 cw(c-984,-1501.07) -984,-1482.21 cw(c-984,-1463.36) v1@-997.33,-1476.69
  Bottom Layer w8: J5.2@-1269.85,-1279.74 cw(c-1269.85,-1341.37) -1226.28,-1297.79 cw(c-1182.7,-1254.21) J5.2@-1244.33,-1254.21 ; J5.2@-1269.85,-1271.74 cw(c-1269.85,-1314.06) -1239.93,-1284.13 cw(c-1210.01,-1254.21) J5.2@-1252.33,-1254.21 ; J5.2@-1269.85,-1254.21 -1098.07,-1426 -1059.07,-1426 v1(-1002.85,-1482.21) ; v1@-1010.67,-1482.21 ccw(c-1029.52,-1482.21) -1016.19,-1468.88 ccw(c-1002.85,-1455.54) v1@-1002.85,-1474.4
SWDIO: IC1.5 J5.1 | length 2944.6
  Top Layer w8: v1(-1081.85,-1455.21) 293.15,-1455.21 385.86,-1362.5 385.86,-765.48 306.72,-686.34 258.79,-686.34 IC1.5@196.67,-624.21 ; v1@-1076.33,-1460.74 cw(c-1063,-1474.07) -1063,-1455.21 cw(c-1063,-1436.36) v1@-1076.33,-1449.69
  Bottom Layer w8: J5.1@-1369.85,-1279.74 cw(c-1369.85,-1341.37) -1326.28,-1297.79 cw(c-1282.7,-1254.21) J5.1@-1344.33,-1254.21 ; J5.1@-1369.85,-1271.74 cw(c-1369.85,-1314.06) -1339.93,-1284.13 cw(c-1310.01,-1254.21) J5.1@-1352.33,-1254.21 ; J5.1@-1369.85,-1254.21 -1168.85,-1455.21 v1(-1081.85,-1455.21) ; v1@-1087.38,-1460.74 ccw(c-1100.71,-1474.07) -1100.71,-1455.21 ccw(c-1100.71,-1436.36) v1@-1087.38,-1449.69
TX1: IC1.9 J1.2 TM1.1 | length 3380.8
  Top Layer w8: J1.2@-1269.85,-768.21 -1117,-921.07 -1117,-1103.62 -1095.85,-1124.76 -1095.85,-1378.21 -1049.85,-1424.21 154.15,-1424.21 190.15,-1388.21 190.15,-1169.21 231.15,-1128.21 ; IC1.9@39.19,-624.21 117.19,-702.21 300.15,-702.21 366.27,-768.34 366.27,-1062.09 300.15,-1128.21 231.15,-1128.21 ; TM1.1@173.1,-1178.26 cw(c131.93,-1219.43) 190.15,-1219.43 ; TM1.1@178.75,-1172.61 cw(c151.24,-1200.11) 190.15,-1200.11 ; 190.15,-1224.26 cw(c255.19,-1224.26) TM1.1@209.2,-1178.26 ; 190.15,-1204.94 cw(c235.88,-1204.94) TM1.1@203.54,-1172.61 ; TM1.1@196.56,-1143.54 ccw(c204.26,-1119.8) 221.91,-1137.45 ; TM1.1@199.02,-1135.93 ccw(c208.78,-1105.85) 231.14,-1128.21 ; TM1.1@216.67,-1160.21 cw(c258.99,-1160.21) 229.07,-1130.29
TX1A: R3.1 TM1.2 | length 1042.9
  Top Layer w8: R3.1@-385.85,-757.21 -354.73,-726.09 -248.98,-726.09 -39.07,-936 71,-936 92.15,-957.15 v1(92.15,-1039.21) ; R3.1@-385.85,-743.89 ccw(c-385.85,-711.73) -363.11,-734.47 ccw(c-340.37,-757.21) R3.1@-372.53,-757.21
  Bottom Layer w8: TM1.2@73.1,-1142.16 ccw(c31.93,-1101) 90.15,-1101 ; TM1.2@78.75,-1147.82 ccw(c51.24,-1120.31) 90.15,-1120.31 ; v1@86.62,-1044.74 cw(c78.12,-1053.24) 90.15,-1053.24 ; TM1.2@90.15,-1169.21 90.15,-1041.21 v1(92.15,-1039.21) ; 90.15,-1115.48 ccw(c135.88,-1115.48) TM1.2@103.54,-1147.82 ; 90.15,-1096.17 ccw(c155.19,-1096.17) TM1.2@109.2,-1142.16 ; 90.15,-1062.9 cw(c115.83,-1062.9) v1@97.67,-1044.74
TX2: IC1.17 R5.1 | length 1458.6
  Top Layer w8: v1@-549.38,-481.74 ccw(c-562.71,-495.07) -562.71,-476.21 ccw(c-562.71,-457.36) v1@-549.38,-470.69 ; v1(-543.85,-476.21) -597.85,-476.21 -632.85,-511.21 -683.85,-511.21 -716.66,-544.02 -716.66,-643.39 -777.54,-704.27 -777.54,-840.09 -738.14,-879.5 -412.57,-879.5 R5.1@-386.85,-905.21 ; R5.1@-400.18,-905.21 ccw(c-432.34,-905.21) -409.6,-882.47 ccw(c-386.85,-859.73) R5.1@-386.85,-891.89
  Bottom Layer w8: v1(-543.85,-476.21) -511.85,-476.21 -494.85,-493.21 -356.85,-493.21 -307.33,-542.73 -307.33,-558.54 -275.78,-590.1 ; v1@-538.33,-481.74 cw(c-525,-495.07) -525,-476.21 cw(c-525,-457.36) v1@-538.33,-470.69 ; IC1.17@-285.98,-612.3 ccw(c-305.02,-590.11) -275.78,-590.11 ; IC1.17@-275.78,-624.21 -275.78,-590.1 ; IC1.17@-265.57,-612.3 cw(c-246.53,-590.11) -275.78,-590.11
TX3: IC1.19 R9.1 | length 1734.2
  Top Layer w8: -374.29,-588.82 cw(c-404.21,-618.73) IC1.19@-362.15,-623.37 ; IC1.19@-370.11,-622.49 ccw(c-425.43,-616.39) -386.07,-577.03 ; -362.51,-600.6 cw(c-382.98,-621.07) IC1.19@-354.2,-624.25 ; IC1.19@-354.52,-624.21 -354.52,-608.59 -386.07,-577.03 ; R9.1@-276.23,881.79 cw(c-308.4,881.79) -285.65,859.04 cw(c-262.91,836.3) R9.1@-262.91,868.46 ; R9.1@-262.91,881.79 -386.07,758.62 -386.07,-577.03
TX4: IC1.79 J4.2 | length 4122.7
  Top Layer w8: J4.2@-1269.85,-1092.21 -1216,-1146.07 -1216,-1389.07 -1076.98,-1528.09 331.27,-1528.09 437.15,-1422.21 437.15,-1.21 462.15,23.79 v1(462.15,382.79) ; v1@456.62,377.26 cw(c443.29,363.93) 462.15,363.93 cw(c481,363.93) v1@467.67,377.26
  Bottom Layer w8: IC1.79@354.15,399.41 445.52,399.41 v1(462.15,382.79) ; IC1.79@365.24,388.32 cw(c392.01,361.54) 392.01,399.41 cw(c392.01,437.28) IC1.79@365.24,410.5 ; v1@454.33,382.79 ccw(c435.48,382.79) 448.81,396.12 ccw(c462.15,409.46) v1@462.15,390.6
USART2R: J2.3 U232.8 | length 1658.4
  Top Layer w8: v1@-430.36,-816.69 ccw(c-443.69,-803.36) -424.83,-803.36 ccw(c-405.97,-803.36) v1@-419.31,-816.69 ; v1@-424.83,-829.19 -424.83,-733.19 -401.85,-710.21 -203.22,-710.21 U232.8@-117.42,-796.01 ; -167.72,-745.71 ccw(c-117.42,-695.41) U232.8@-117.42,-766.54 ; -154.06,-759.37 ccw(c-117.42,-722.72) U232.8@-117.42,-774.54 ; -140.41,-773.02 ccw(c-117.42,-750.04) U232.8@-117.42,-782.54 ; -126.75,-786.68 ccw(c-117.42,-777.35) U232.8@-117.42,-790.54
  Bottom Layer w8: J2.3@-1169.85,-955.74 cw(c-1169.85,-1017.37) -1126.28,-973.79 cw(c-1082.7,-930.21) J2.3@-1144.33,-930.21 ; J2.3@-1169.85,-947.74 cw(c-1169.85,-990.06) -1139.93,-960.13 cw(c-1110.01,-930.21) J2.3@-1152.33,-930.21 ; J2.3@-1169.85,-930.21 -1092.85,-1007.21 -607.36,-1007.21 -424.83,-824.69 v1(-424.83,-822.21) ; -439.92,-839.77 ccw(c-457.47,-822.21) v1@-432.64,-822.21 ; -433.94,-833.8 cw(c-424.83,-842.91) v1@-424.83,-830.02
USART2T: J2.2 U232.7 | length 1651.3
  Top Layer w8: v1(-555,-831) -554.82,-831.18 -473.82,-831.18 -440.98,-798.34 -440.98,-709.79 -419.28,-688.09 -167.98,-688.09 -91.83,-764.24 U232.7@-91.83,-796.01 ; -100.44,-755.63 cw(c-114.24,-769.43) U232.7@-94.72,-769.43
  Bottom Layer w8: J2.2@-1269.85,-930.21 -1269.85,-912.21 -1237.85,-880.21 ; J2.2@-1269.85,-904.69 ccw(c-1269.85,-886.51) -1257,-899.36 ; J2.2@-1261.01,-926.67 cw(c-1235.8,-916.57) -1255,-897.36 ; J2.2@-1253.58,-923.69 cw(c-1223.55,-911.66) -1246.43,-888.79 ; J2.2@-1246.16,-920.72 cw(c-1211.31,-906.76) -1237.86,-880.21 ; v1(-555,-831) -579.21,-855.21 -836.3,-855.21 -967.09,-986 -1084,-986 -1114,-956 -1114,-927.52 -1161.3,-880.21 -1237.85,-880.21
USB_D+: IC1.8 USB1.3 | length 2833
  Top Layer w15.75: USB1.3@-782.86,1201.79 -823.6,1242.53 -899.73,1242.53 -923.6,1218.66 -923.6,1104.91 -584.84,766.15 -467.17,766.15 -457.94,756.92 -457.94,662.76 -626.17,494.54 -626.17,-43.9 -545.85,-124.21 v1(-543.85,-124.21) ; -553.99,-116.08 ccw(c-543.85,-105.94) v1@-543.85,-120.28 ; v1@34.15,-300.21 120.15,-386.21 120.15,-543.25 IC1.8@117.93,-545.47 ; v1@39.08,-299.21 ccw(c53.42,-299.21) 43.28,-309.35
  Bottom Layer w15.75: v1(-543.85,-124.21) -390.85,-277.21 13.15,-277.21 v1(35.15,-299.21)
USB_D-: IC1.7 USB1.2 | length 3130.8
  Top Layer w19.68: v1(320.15,-480.21) 395.83,-404.53 395.83,475.04 429.15,508.35 v1(429.15,923.79)
  Bottom Layer w19.68: USB1.2@-782.86,1121.79 -234.85,1121.79 -77.85,964.79 388.15,964.79 v1(429.15,923.79) ; USB1.2@-772.14,1111.07 cw(c-746.26,1085.19) -746.26,1121.79 cw(c-746.26,1158.38) USB1.2@-772.14,1132.5 ; IC1.7@117.93,-624.21 159.26,-582.87 159.26,-529.98 209.03,-480.21 v1(320.15,-480.21) ; IC1.7@117.93,-614.37 ccw(c117.93,-590.61) 134.73,-607.41 ccw(c151.53,-624.21) IC1.7@127.77,-624.21
VCC: C1.1 C2.1 C7.1 COM1.2 IC2.6 UI1.1 UI2.1 UI3.1 UI4.1 UI5.1 UI6.1 UI7.1 UI8.1 UI9.1 UI10.1 UI11.1 UI12.1 UOA.10 UOB.10 UOC.10 | length 13904.8
  Top Layer w25: UI12.1@2705.15,344.79 2705.15,392.98 UI12.1@2708.15,395.98
  Top Layer w40: IC2.6@-1359.35,399.41 IC2.6@-1359.35,478.15 IC2.6@-1438.09,478.15 ; C2.1@-1023.91,150.07 -1023.91,192.79 ; C1.1@-1023.91,242.36 -1023.91,192.79 ; -888.85,1493.79 -631.85,1236.79 -378.64,1236.79 COM1.2@-295.64,1319.79 ; UI1.1@513.15,395.98 513.15,360.79 592.15,281.79 623.15,281.79 ; UI1.1@522.67,370.39 ccw(c568.85,370.39) 536.2,337.74 ; UI2.1@712.69,395.98 712.69,371.33 623.15,281.79 ; UI3.1@892.78,346.43 ccw(c868.83,370.39) UI3.1@902.71,370.39 ; UI3.1@912.24,395.98 912.24,365.88 828.15,281.79 ; UOA.10@939,135.79 939,195.64 1025.15,281.79 ; UI4.1@1111.78,395.98 1111.78,368.42 1025.15,281.79 ; UI5.1@1291.23,344.87 ccw(c1265.72,370.39) UI5.1@1301.8,370.39 ; UI5.1@1311.33,395.98 1311.33,364.97 1228.15,281.79 ; UOB.10@1464.15,135.79 1464.15,214.93 1531,281.79 ; UI6.1@1491.16,345.81 ccw(c1466.58,370.39) UI6.1@1501.35,370.39 ; UI6.1@1510.87,395.98 1510.87,365.51 1427.15,281.79 ; UI7.1@1710.42,395.98 1710.42,369.06 1623.15,281.79 ; UI8.1@1909.96,395.98 1909.96,371.46 1820.29,281.79 ; UOC.10@1973,136.92 1973.92,136 2026.79,136 ; 2026.15,284.79 2109.51,368.15 UI9.1@2109.51,395.98 ; UI10.1@2288.77,344.41 ccw(c2262.79,370.39) UI10.1@2299.53,370.39 ; UI10.1@2309.05,395.98 2309.05,364.7 2226.15,281.79 ; UI11.1@2508.6,395.98 2508.6,368.24 2422.15,281.79 ; UI12.1@2705.15,344.79 2642.15,281.79 2422.15,281.79 ; IC2.6@-1438.09,478.15 IC2.6@-1438.09,399.41 -1438.09,228.9 -1401.97,192.79 -1023.91,192.79 ; IC2.6@-1438.09,478.15 -1438.09,1107.55 C7.1@-1382.85,1162.79 -1051.85,1493.79 2780.15,1493.79 2996.15,1277.79 2996.15,346.15 2480.66,-169.34 2145,-169.34 2026.79,-51.13 2026.79,136 ; 623.15,281.79 828.15,281.79 ; 828.15,281.79 1025.15,281.79 ; 1025.15,281.79 1228.15,281.79 ; 1228.15,281.79 1427.15,281.79 ; 1427.15,281.79 1531,281.79 ; 1531,281.79 1623.15,281.79 ; 1623.15,281.79 1820.29,281.79 ; 1820.29,281.79 2132.79,281.79 ; 2026.79,136 2026.79,175.79 2132.79,281.79 ; 2132.79,281.79 2226.15,281.79 ; 2226.15,281.79 2422.15,281.79
pads on no net: Batt.0 IC1.14 IC1.15 IC1.16 IC1.21 IC1.22 IC1.42 IC1.43 IC1.45 IC1.46 IC1.61 IC1.63 IC1.64 IC1.65 IC1.66 IC1.69 IC1.70 IC1.75 IC1.76 IC1.77 IC1.78 UCAN.5

## Polygon pours and split planes (outlines as drawn)
GND on Mechanical 1 "Bottom Layer-No Net" (solid, remove dead copper): -1534.3,1738.26 3284.59,1738.26 3284.59,-1702.69 -1534.3,-1702.69 -1534.3,1738.26
GND on Bottom Layer "Bottom Layer-No Net" (solid, remove dead copper, pour order 5): -1534.3,1738.26 3284.59,1738.26 3284.59,-1702.69 -1534.3,-1702.69 -1534.3,1738.26
GND on Top Layer "Bottom Layer-No Net" (solid, remove dead copper, pour order 7): -1534.3,1738.26 3284.59,1738.26 3284.59,-1702.09 3284,-1702.69 -1534.3,-1702.69 -1534.3,1738.26

## Keep-outs
Keep-Out Layer:
  lines w10: -1534.3,-1702.69 -1534.3,1738.26 3284.59,1738.26 3284.59,-1702.69 -1534.3,-1702.69
  lines w12: 2979,-331 2979,262 2980,261 3264,261 3264,-331 3250,-331 2979,-331

## Silkscreen, mask and mechanical layers (free items; w line width, h text height)
Top Overlay:
  drawing of 966 lines, arcs and shapes, not listed
  text "POWER" at -364.85,1557.79 h98.43
  text "RS485" at 85.15,1557.79 h98.43
  text "PE3" at 1052.15,1460.79 h86.61
  text "PE2" at 861.15,1458.79 h86.61
  text "PE4" at 1268.15,1458.79 h86.61
  text "PE7" at 1870.15,1458.79 h86.61
  text "PE8" at 2065.15,1458.79 h86.61
  text "PE9" at 2262.15,1458.79 h86.61
  text "PE10" at 2426.15,1458.79 h86.61
  text "PE11" at 2634.15,1458.79 h86.61
  text "PD9" at 245.15,1457.79 h78.74
  text "PE0" at 458.15,1457.79 h86.61
  text "PE1" at 664.15,1457.79 h86.61
  text "PE5" at 1455.15,1457.79 h86.61
  text "PE6" at 1679.15,1456.79 h86.61
  text "PD8" at 59.15,1454.79 h78.74
  text "-" at -101.85,1445.79 h120
  text "+" at -321.85,1434.79 h120
  text "USB" at -918.85,1354.79 h80
  text "Res" at -550.85,1202.79 h80
  text "GND" at -161,1186 h90
  text "485A" at 31,1184 h90
  text "485B" at 237,1184 h90
  text "VCC" at -368,1183 h90
  text "In1" at 456.15,1161.79 h118.11
  text "In2" at 655.78,1161.79 h118.11
  text "In3" at 855.42,1161.79 h118.11
  text "In4" at 1055.05,1162.12 h118.11
  text "In5" at 1254.69,1162.12 h118.11
  text "In6" at 1454.33,1161.79 h118.11
  text "In7" at 1653.96,1162.12 h118.11
  text "In8" at 1853.6,1161.79 h118.11
  text "In9" at 2053.24,1161.79 h118.11
  text "In12" at 2652.15,1161.79 h118.11
  text "In10" at 2229.15,1158.79 h118.11
  text "In11" at 2441.15,1158.79 h118.11
  text "POW" at -576.85,1136.79 h65
  text "ERR" at -342.85,1128.79 h65
  text "RUN" at -66.85,1127.79 h65
  text "PB2" at -870,809 h39.37
  text "Buzzer" at -902,736 h39.37
  text "+3.3V" at 2556,184 h78.74
  text "GND" at 2375,180 h78.74
  text "CS" at 2556,79.62 h78.74
  text "CE" at 2375,78 h78.74
  text "CLK" at 2375,-24 h78.74
  text "MOSI" at 2556,-24.4 h78.74
  text "CM" at 3142.15,-117.21 h157.48 r90
  text "IRQ" at 2556,-122 h78.74
  text "MISO" at 2375,-126 h78.74
  text "SPI3" at 2165,-244 h90
  text "电源板" at -1166.85,-386.21 h118.11 r90
  text "核心板" at -332.85,-459.21 h118.11
  text "3.3V" at -1422.85,-708.21 h59.06
  text "TX" at -1299.85,-708.21 h59.06
  text "GND" at -1120.85,-709.21 h59.06
  text "5V" at -996.85,-709.21 h59.06
  text "RX" at -1207.85,-710.21 h59.06
  text "HO" at -200,-1150 h70.87
  text "232T" at -100,-1157 h78.74
  text "LO" at -544,-1167 h70.87
  text "232R" at 246,-1167 h78.74
  text "SCK" at -1321.85,-1193.21 h55
  text "SIO" at -1416.85,-1194.21 h60
  text "GND" at -1215.85,-1195.21 h55
  text "Out4" at 1010,-1207 h90
  text "Out1" at 429,-1209 h90
  text "Out7" at 1609,-1209 h90
  text "Out8" at 1816,-1209 h90
  text "Out12" at 2693,-1209 h90
  text "GND" at -174,-1210 h78.74
  text "Out3" at 814,-1212 h90
  text "Out6" at 1422,-1212 h90
  text "Out5" at 1204,-1213 h106.3
  text "Out11" at 2453,-1213 h90
  text "Out9" at 2013,-1214 h90
  text "Out2" at 629,-1216 h90
  text "Out10" at 2210,-1216 h90
  text "SW2" at -956.85,-1253.21 h62.99
  text "SW1" at -1079.85,-1255.21 h62.99
  text "SW3" at -836.85,-1256.21 h62.99
  text "SW4" at -718.85,-1256.21 h62.99
  text "SWD" at -1463,-1294 h50 r90
  text "PA10" at 224.15,-1461.21 h98.43
  text "GND" at -144.85,-1462.21 h78.74
  text "PA9" at 54.15,-1464.21 h98.43
  text "PB8" at -351,-1466 h78.74
  text "PB9" at -561,-1467 h78.74
  text "PC5" at 1451.15,-1488.21 h86.61
  text "PC2" at 857.15,-1490.21 h86.61
  text "PC4" at 1256.15,-1490.21 h86.61
  text "PC6" at 1661.15,-1490.21 h86.61
  text "PC7" at 1859.15,-1491.21 h86.61
  text "PC3" at 1053.15,-1492.21 h86.61
  text "PC1" at 651.15,-1494.21 h86.61
  text "PE12" at 2030.15,-1494.21 h86.61
  text "PC0" at 447.15,-1495.21 h86.61
  text "PE14" at 2434.15,-1495.21 h86.61
  text "PE15" at 2628.15,-1495.21 h86.61
  text "PE13" at 2237.15,-1496.21 h86.61
  text "PA4" at -980.85,-1525.21 h78.74 r90
  text "PA5" at -876.85,-1525.21 h78.74 r90
  text "PA6" at -776.85,-1527.21 h78.74 r90
  text "PA7" at -682.85,-1527.21 h78.74 r90
  text "CAN" at -501,-1583 h118.11
  text "SWITCH" at -1039.85,-1603.21 h110.24
Top Solder:
  text "YWS®86" at 3155,308 h145.67 r90
  text "V1.5" at 3197.15,-541.21 h90 r90
  text "Dozen IO控制器" at 3205,-1293 h130 r90

## Dimensions
-1534.3,1738.26 to -1534.3,-1702.69 on Top Overlay
-1534.3,-1702.69 to 3284.59,-1702.69 on Top Overlay
-1093.36,1738.26 to 2843.65,1738.26 on Top Overlay
-1534.3,1395.74 to -1534.3,-1360.17 on Top Overlay

## Text inside footprints (layer, text, board x,y; h text height)
S1: Top Overlay "DP" at -694.85,-1422.21 h31.5; Top Overlay "ON" at -1019.85,-1422.21 h31.5